# EAGLE board RasPiTimePowerSWv.1.2 (EAGLE 7.7.0)
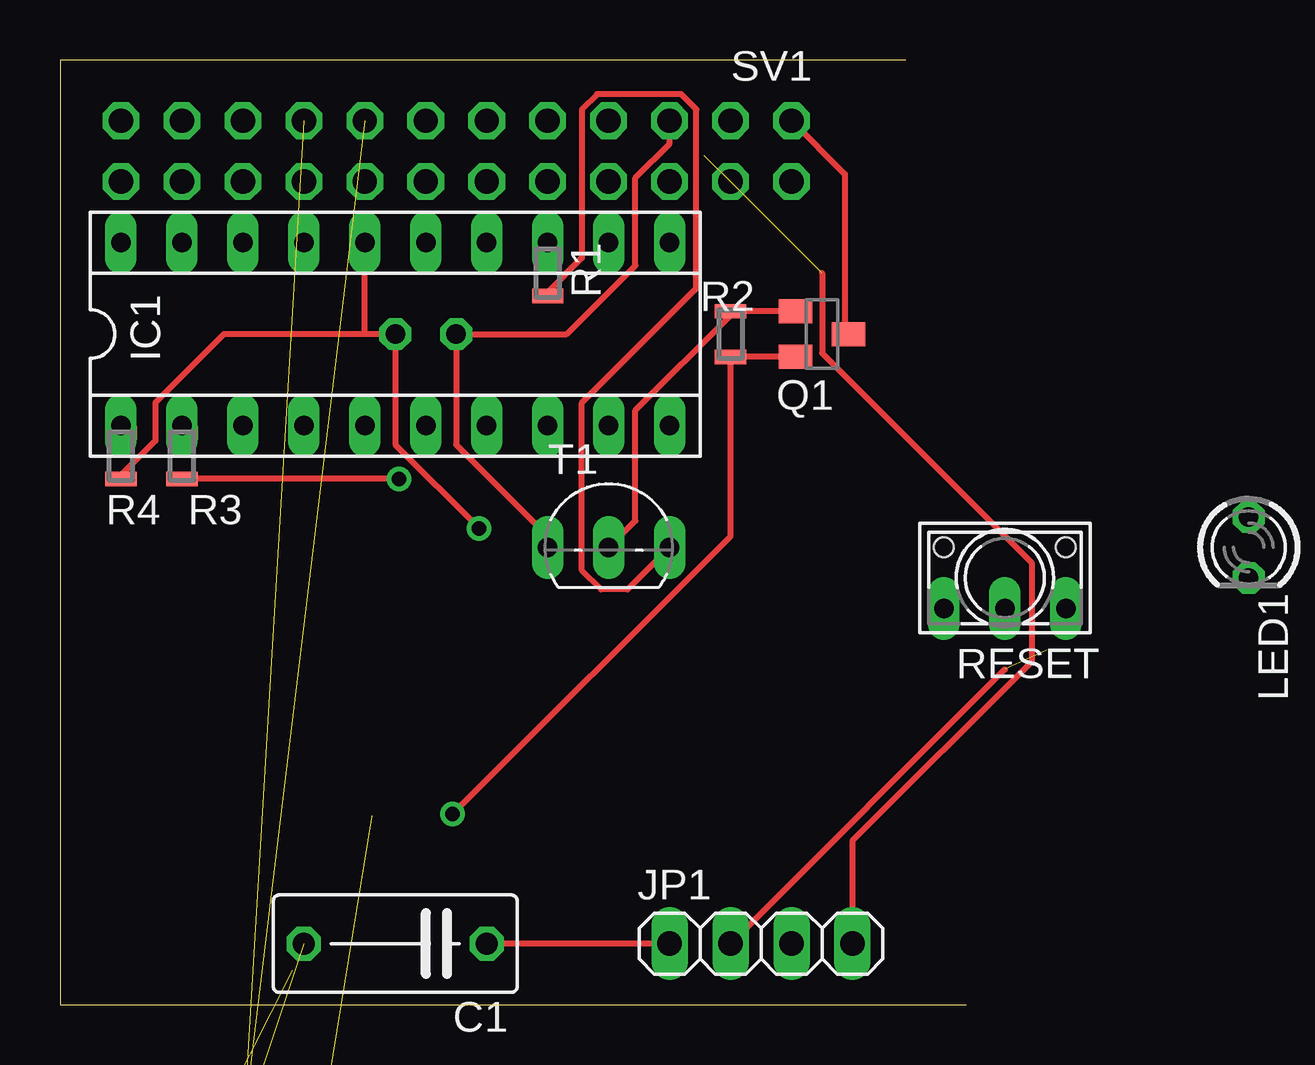
[diagram p0: board, top side]
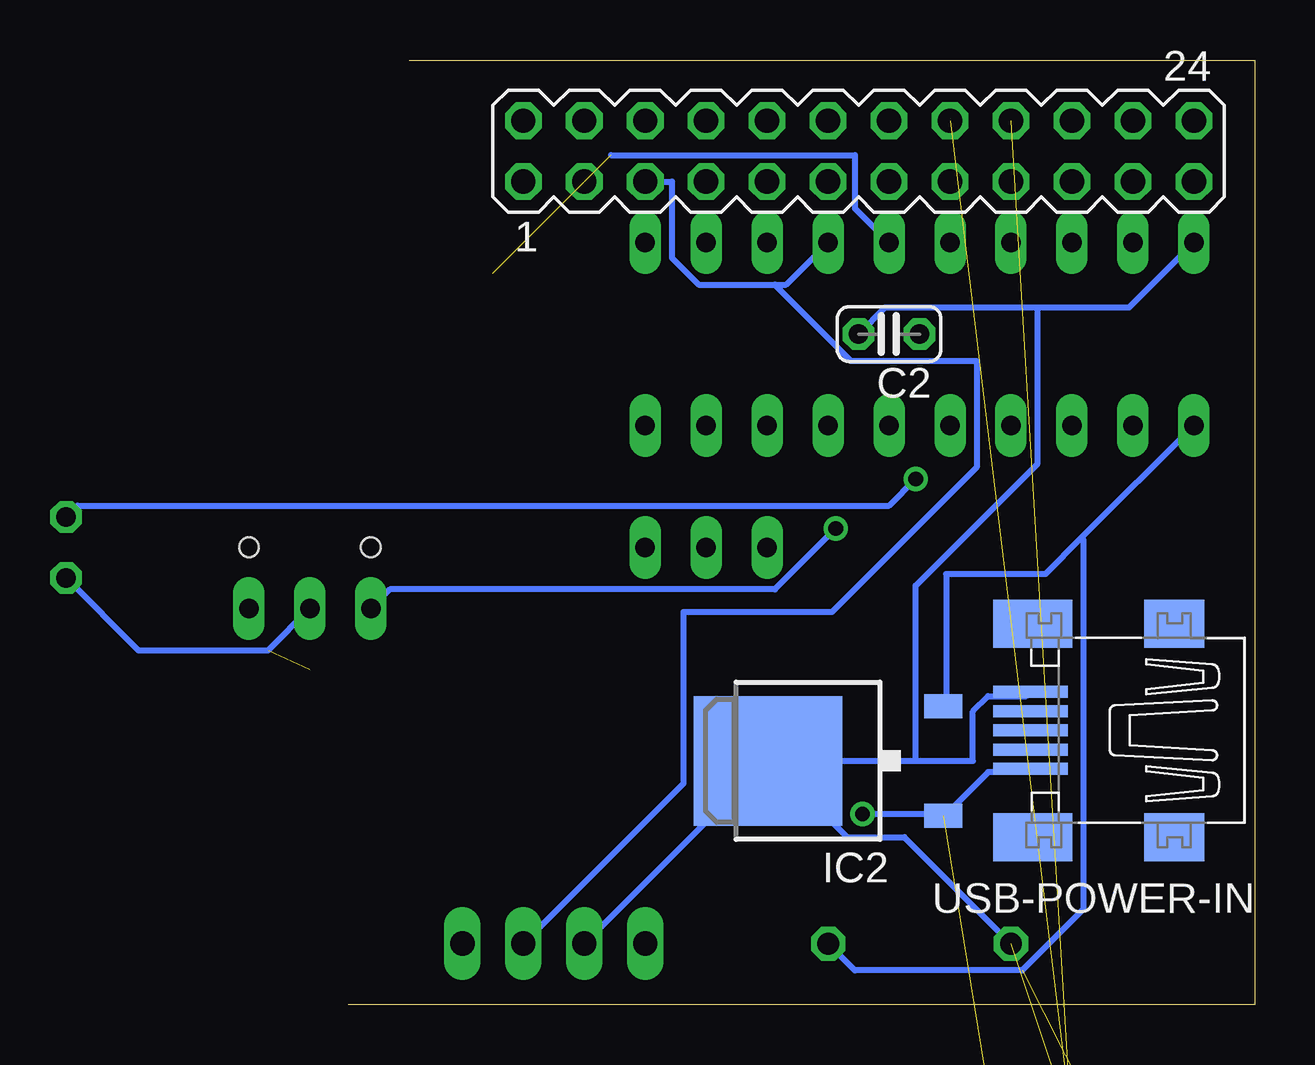
[diagram p1: board, bottom side, seen from below]

Size 37.77 x 39.36 mm. Coordinates in mm from the lower left corner, seen from the top.
Outline: 37.77,0 0,0 0,39.36 35.23,39.36
Copper layers (1*16): Top 0.035mm / dielectric 1.5mm / Bottom 0.035mm
Design rules "default": minimum track width 10mil, minimum drill 24mil, track to track 8mil, track to pad 8mil, pad to pad 8mil, via to via 8mil, smd to smd 8mil, copper to edge 40mil, drill to drill 8mil, minimum pad ring 10mil, minimum via ring 8mil, stop-mask expansion 4mil, vias tented up to drill 0mil, thermal gap 10mil

## Footprints (pad centres in the part's own frame; a part is rotated, then mirrored left to right if it is on the bottom)
C075-042X103 = drill 0.914 octagon: 1 -3.81,0; 2 3.81,0
C025-024X044 = drill 0.813 octagon: 1 -1.27,0; 2 1.27,0
SOCKET-20 = drill 0.813 long: 1 -11.43,-3.81; 2 -8.89,-3.81; 3 -6.35,-3.81; 4 -3.81,-3.81; 5 -1.27,-3.81; 6 1.27,-3.81; 7 3.81,-3.81; 8 6.35,-3.81; 9 8.89,-3.81; 10 11.43,-3.81; 11 11.43,3.81; 12 8.89,3.81; 13 6.35,3.81; 14 3.81,3.81; 15 1.27,3.81; 16 -1.27,3.81; 17 -3.81,3.81; 18 -6.35,3.81; 19 -8.89,3.81; 20 -11.43,3.81
TO252 = smd 1 x 1.6: 1 -2.28,-4.8; 2 2.28,-4.8 | smd 5.4 x 6.2: 3 0,2.5
1X04 = drill 1.016 long: 1 -3.81,0; 2 -1.27,0; 3 1.27,0; 4 3.81,0
LED3MM = drill 0.813 octagon: A -1.27,0; K 1.27,0
SOT23 = smd 1 x 1.4: 1 -0.95,-1.1; 2 0.95,-1.1; 3 0,1.1
MINI_MELF-0102W = smd 0.6 x 1.3: 1 -0.95,0; 2 0.95,0
9450-1 = drill 0.813 long: 1 -2.54,-1.27; 2 0,-1.27; 3 2.54,-1.27 | hole 0.813: 2.54,1.27; -2.54,1.27
255SB = drill 1.118 long: 1 -3.81,0; 2 0,0; 3 3.81,0
MA12-2 = drill 1.016 octagon: 1 -13.97,-1.27; 2 -13.97,1.27; 3 -11.43,-1.27; 4 -11.43,1.27; 5 -8.89,-1.27; 6 -8.89,1.27; 7 -6.35,-1.27; 8 -6.35,1.27; 9 -3.81,-1.27; 10 -3.81,1.27; 11 -1.27,-1.27; 12 -1.27,1.27; 13 1.27,-1.27; 14 1.27,1.27; 15 3.81,-1.27; 16 3.81,1.27; 17 6.35,-1.27; 18 6.35,1.27; 19 8.89,-1.27; 20 8.89,1.27; 21 11.43,-1.27; 22 11.43,1.27; 23 13.97,-1.27; 24 13.97,1.27
TO92-ECB = drill 0.813 long: B 2.54,0; C 0,0; E -2.54,0
32005-400 = smd 3.1 x 0.5: 1 3,1.6; 2 3,0.8; 3 3,0; 4 3,-0.8; 5 3,-1.6 | smd 2.5 x 2: M1 -3,-4.45; M2 -3,4.45 | smd 3.3 x 2: M3 2.9,4.45; M4 2.9,-4.45

## Placement (x,y rotation side)
C1  20μF 16V  [C075-042X103]  13.97,2.54 180 top
C2  1nF(102)  [C025-024X044]  15.24,27.94 180 bottom
C3  1nF(102)  [C025-024X044]  3.81,-12.7 0 top  (outside the outline)
C4  0.1μF(104)  [C025-024X044]  3.81,-26.67 0 top  (outside the outline)
C5  0.33μF  [C025-024X044]  3.81,-40.64 0 top  (outside the outline)
IC1  MSP430G2553  [SOCKET-20]  13.97,27.94 0 top
IC2  NJM2845DL1-33  [TO252]  17.78,10.16 90 bottom
JP1  [1X04]  29.21,2.54 0 top
LED1  TLLG4400  [LED3MM]  49.53,19.05 270 top  (outside the outline)
LED2  TLLG4400  [LED3MM]  3.81,-90.17 0 top  (outside the outline)
Q1  P-ch MOS FET  [SOT23]  31.75,27.94 270 top
R1  [MINI_MELF-0102W]  20.32,30.48 270 top
R2  [MINI_MELF-0102W]  27.94,27.94 270 top
R3  [MINI_MELF-0102W]  5.08,22.86 90 top
R4  47kΩ  [MINI_MELF-0102W]  2.54,22.86 270 top
R5  [MINI_MELF-0102W]  -2.54,-81.28 0 top  (outside the outline)
R6  [MINI_MELF-0102W]  -2.54,-100.33 0 top  (outside the outline)
RESET  9450-1  [9450-1]  39.37,17.78 0 top
S1  [255SB]  7.62,-69.85 0 top  (outside the outline)
SV1  [MA12-2]  16.51,35.56 0 bottom
T1  2SC1815-Y  [TO92-ECB]  22.86,19.05 0 top
USB-POWER-IN  USB Micro  [32005-400]  6.35,11.43 180 bottom

## Library data of the parts
C1-C5 R4 = resistor
IC1 = ic-package
IC2 = linear; 1: IN; 2: VO
JP1 = pinhead
LED1 LED2 = led; MF: VISHAY SEMICONDUCTOR; OC_FARNELL: 1612435
Q1 = transistor-small-signal
R1 = resistor; R: 10kΩ
R2 = resistor; 1K: 23.5kΩ
R3 R6 = resistor; R: 200Ω
R5 = resistor; 1K: 1kΩ
RESET = switch-misc
S1 = switch
SV1 = con-lstb; OC_FARNELL: unknown; OC_NEWARK: unknown
T1 = transistor
USB-POWER-IN = con-cypressindustries; 5V: 5; OC_FARNELL: unknown; OC_NEWARK: unknown

## Nets
3.3V: C1.1 C3.1 C4.1 IC1.1 IC2.2 JP1.1 R4.1
5V: Q1.3 SV1.2
5VIN: C5.2 IC2.1 Q1.2 R2.2 USB-POWER-IN.1
GND: C1.2 C2.2 C3.2 C4.2 C5.1 IC1.20 IC2.3 JP1.2 LED1.K R6.1 RESET.2 S1.2 SV1.6 T1.E USB-POWER-IN.5
N$1: R1.2 T1.B
N$2: IC1.13 R1.1
N$4: IC1.2 R3.2
N$5: R5.1 S1.1
N$6: Q1.1 R2.1 T1.C
N$7: LED1.A R3.1
N$8: R5.2 SV1.16
N$9: LED2.A SV1.18
N$10: LED2.K R6.2
RESET: C2.1 IC1.16 R4.2 RESET.1
SCL: IC1.14 JP1.3 SV1.5
SDA: IC1.15 JP1.4 SV1.3

## Tracks (layer width: path | path; a pad name or v marks a point on that pad's centre or on a via)
3.3V  (2 unrouted)
  Top 0.254: JP1.1 C1.1 | IC1.1 R4.1
  Bottom 0.254: IC1.1 7.22,19.45 | 7.22,19.45 8.73,17.94 12.86,17.94 12.86,12.54 IC2.2 | C1.1 16.67,1.43 9.68,1.43 7.14,3.97 7.14,19.37 7.22,19.45
5V
  Top 0.254: SV1.2 32.7,34.61 32.7,27.94 Q1.3
5VIN  (via drill 0.61)  (1 unrouted)
  Top 0.254: R2.2 30.64,26.99 Q1.2 | R2.2 27.94,19.53 v16.35,7.94 | R2.2
  Bottom 0.254: USB-POWER-IN.1 9.37,9.68 11.11,9.68 12.86,7.94 IC2.1 13.02,7.94 v16.35,7.94
GND  (6 unrouted)
  Top 0.254: T1.E 20.32,19.53 16.51,23.34 C2.2 21.11,27.94 23.97,30.8 23.97,34.45 25.4,35.88 SV1.6 | JP1.2 39.37,13.97
  Bottom 0.254: IC1.20 5.24,29.05 9.05,29.05 | 9.05,29.05 15.4,29.05 C2.2 | C1.2 14.61,6.99 16.99,6.99 20.16,10.16 IC2.3 | JP1.2 20.32,10.16 IC2.3 | IC2.3 14.13,10.16 | 14.13,10.16 11.75,10.16 11.75,12.22 11.11,12.86 9.53,12.86 9.37,13.02 USB-POWER-IN.5 | 9.05,29.05 9.05,22.54 14.13,17.46 14.13,10.16 | RESET.2 41.12,14.76 46.51,14.76 LED1.K
N$1
  Top 0.254: T1.B 23.65,17.3 22.54,17.3 21.75,18.1 21.75,25.08 26.51,29.84 26.51,37.31 25.88,37.94 22.38,37.94 21.75,37.31 21.75,31.11 20.32,29.69 R1.2
N$2
  Top 0.254: IC1.13 R1.1
N$4
  Top 0.254: IC1.2 R3.2
N$5  (1 unrouted)
N$6
  Top 0.254: Q1.1 30.64,28.89 R2.1 27.94,28.73 23.97,24.77 23.97,20.16 T1.C
N$7  (via drill 0.61)
  Top 0.254: v14.13,21.91 R3.1
  Bottom 0.254: v14.13,21.91 15.24,20.8 49.05,20.8 LED1.A
N$8  (1 unrouted)
N$9  (1 unrouted)
N$10  (1 unrouted)
RESET  (via drill 0.61)
  Top 0.254: 12.7,27.94 C2.1 13.97,23.34 v17.46,19.84 | 12.7,27.94 6.83,27.94 3.97,25.08 3.97,23.5 2.54,22.07 R4.2 | 12.7,27.94 IC1.16
  Bottom 0.254: RESET.1 36.04,17.3 20,17.3 v17.46,19.84
SCL
  Bottom 0.254: IC1.14 19.53,30 20,30 | 20,30 23.18,30 24.29,31.11 24.29,34.29 SV1.5 | JP1.3 23.81,9.21 23.81,16.35 17.62,16.35 11.59,22.38 11.59,26.83 16.83,26.83 20,30
SDA  (2 unrouted)
  Top 0.254: JP1.4 33.02,6.83 40.48,14.29 40.48,18.41 31.75,27.15 31.75,30.48
  Bottom 0.254: IC1.15 16.67,33.18 16.67,35.4 26.83,35.4